# Altium PCB interface.PcbDoc
Units mil, origin at the board's own origin, x right, y up, seen from the top; angles counter-clockwise.
Board outline 2165.35 x 2086.61 mil, 2 copper layers (Top Layer, Bottom Layer); 24 components, 18 nets, 58 pads, 0 vias.
Unrouted connection lines stored in the file: 4.
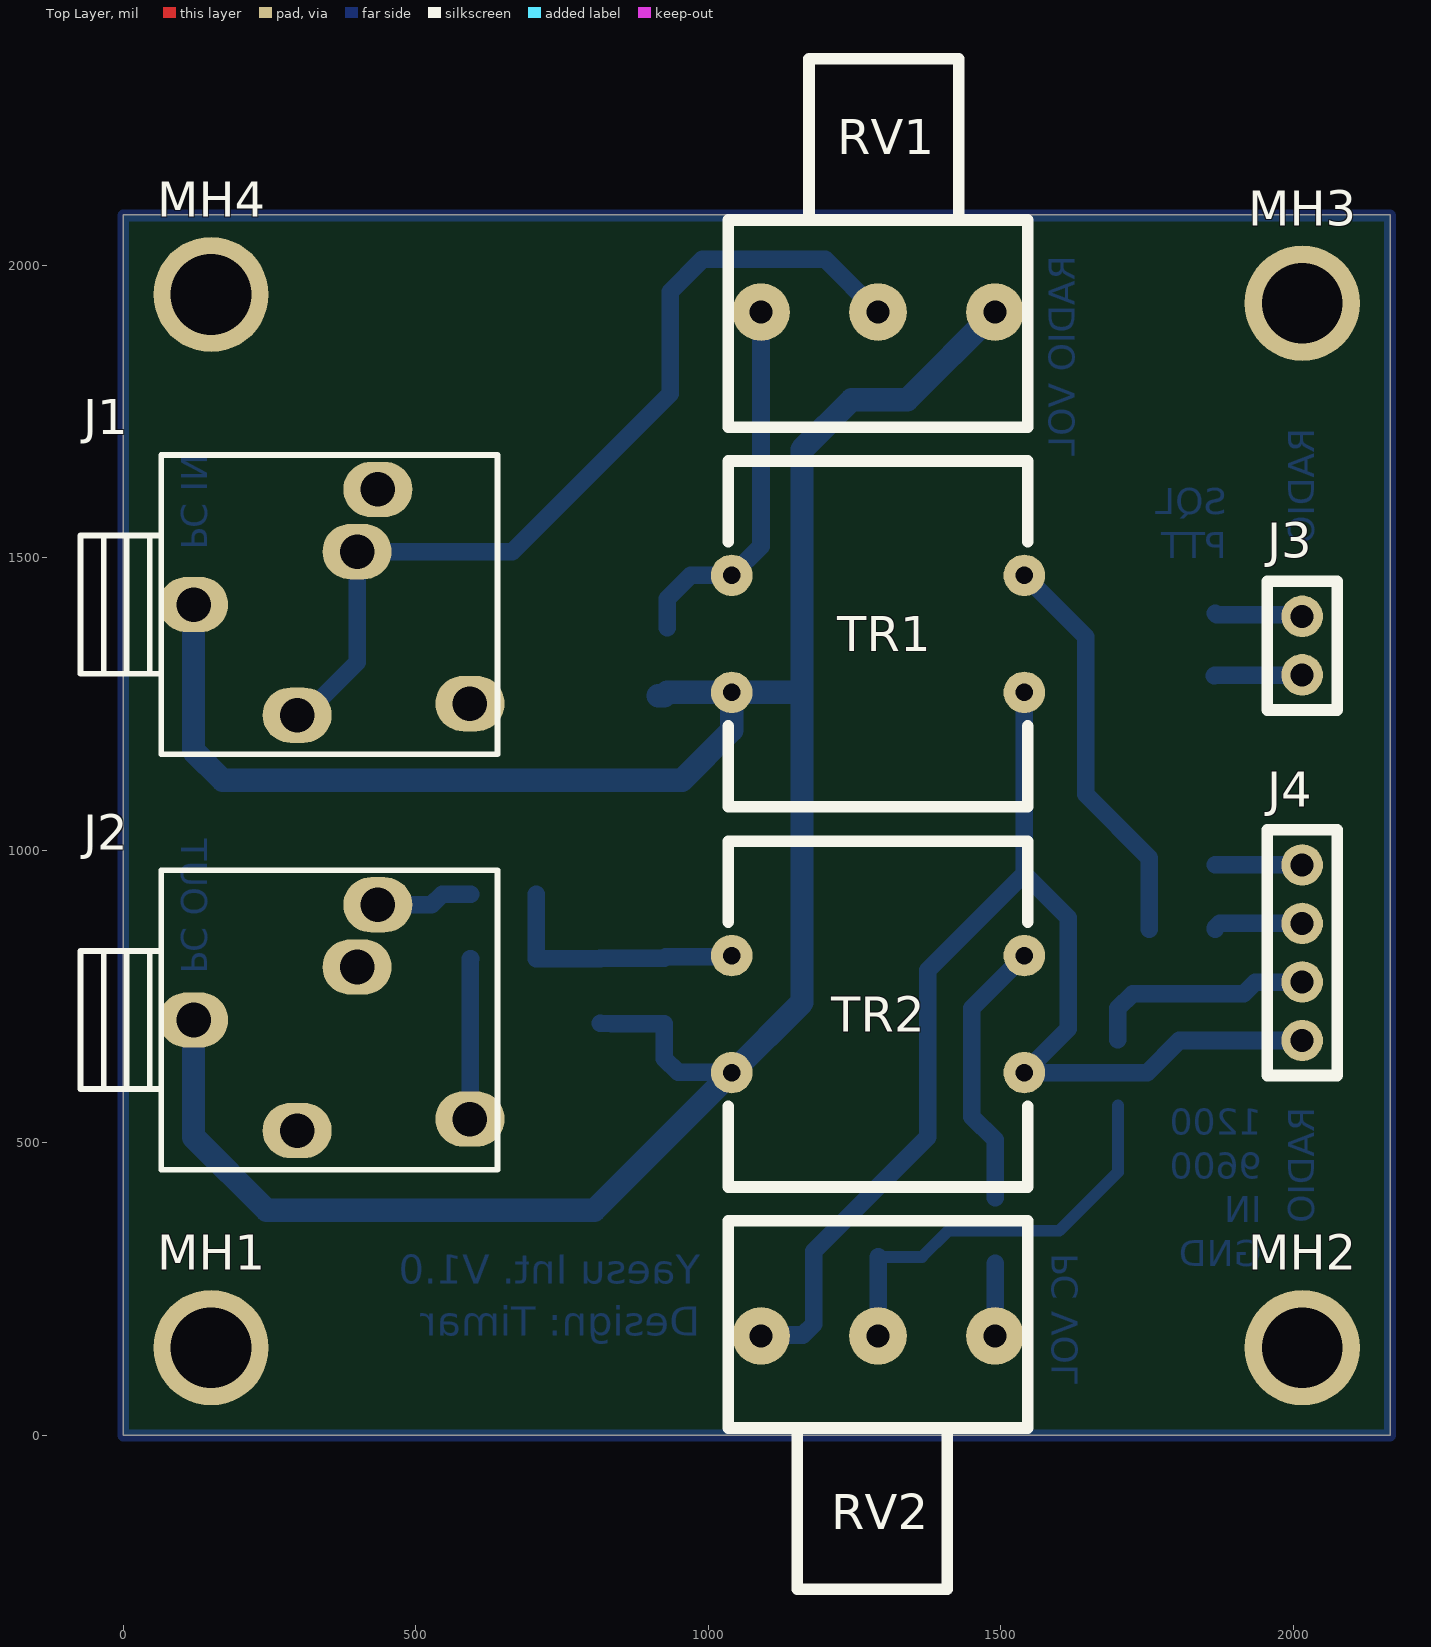
[diagram p0: Top Layer view]
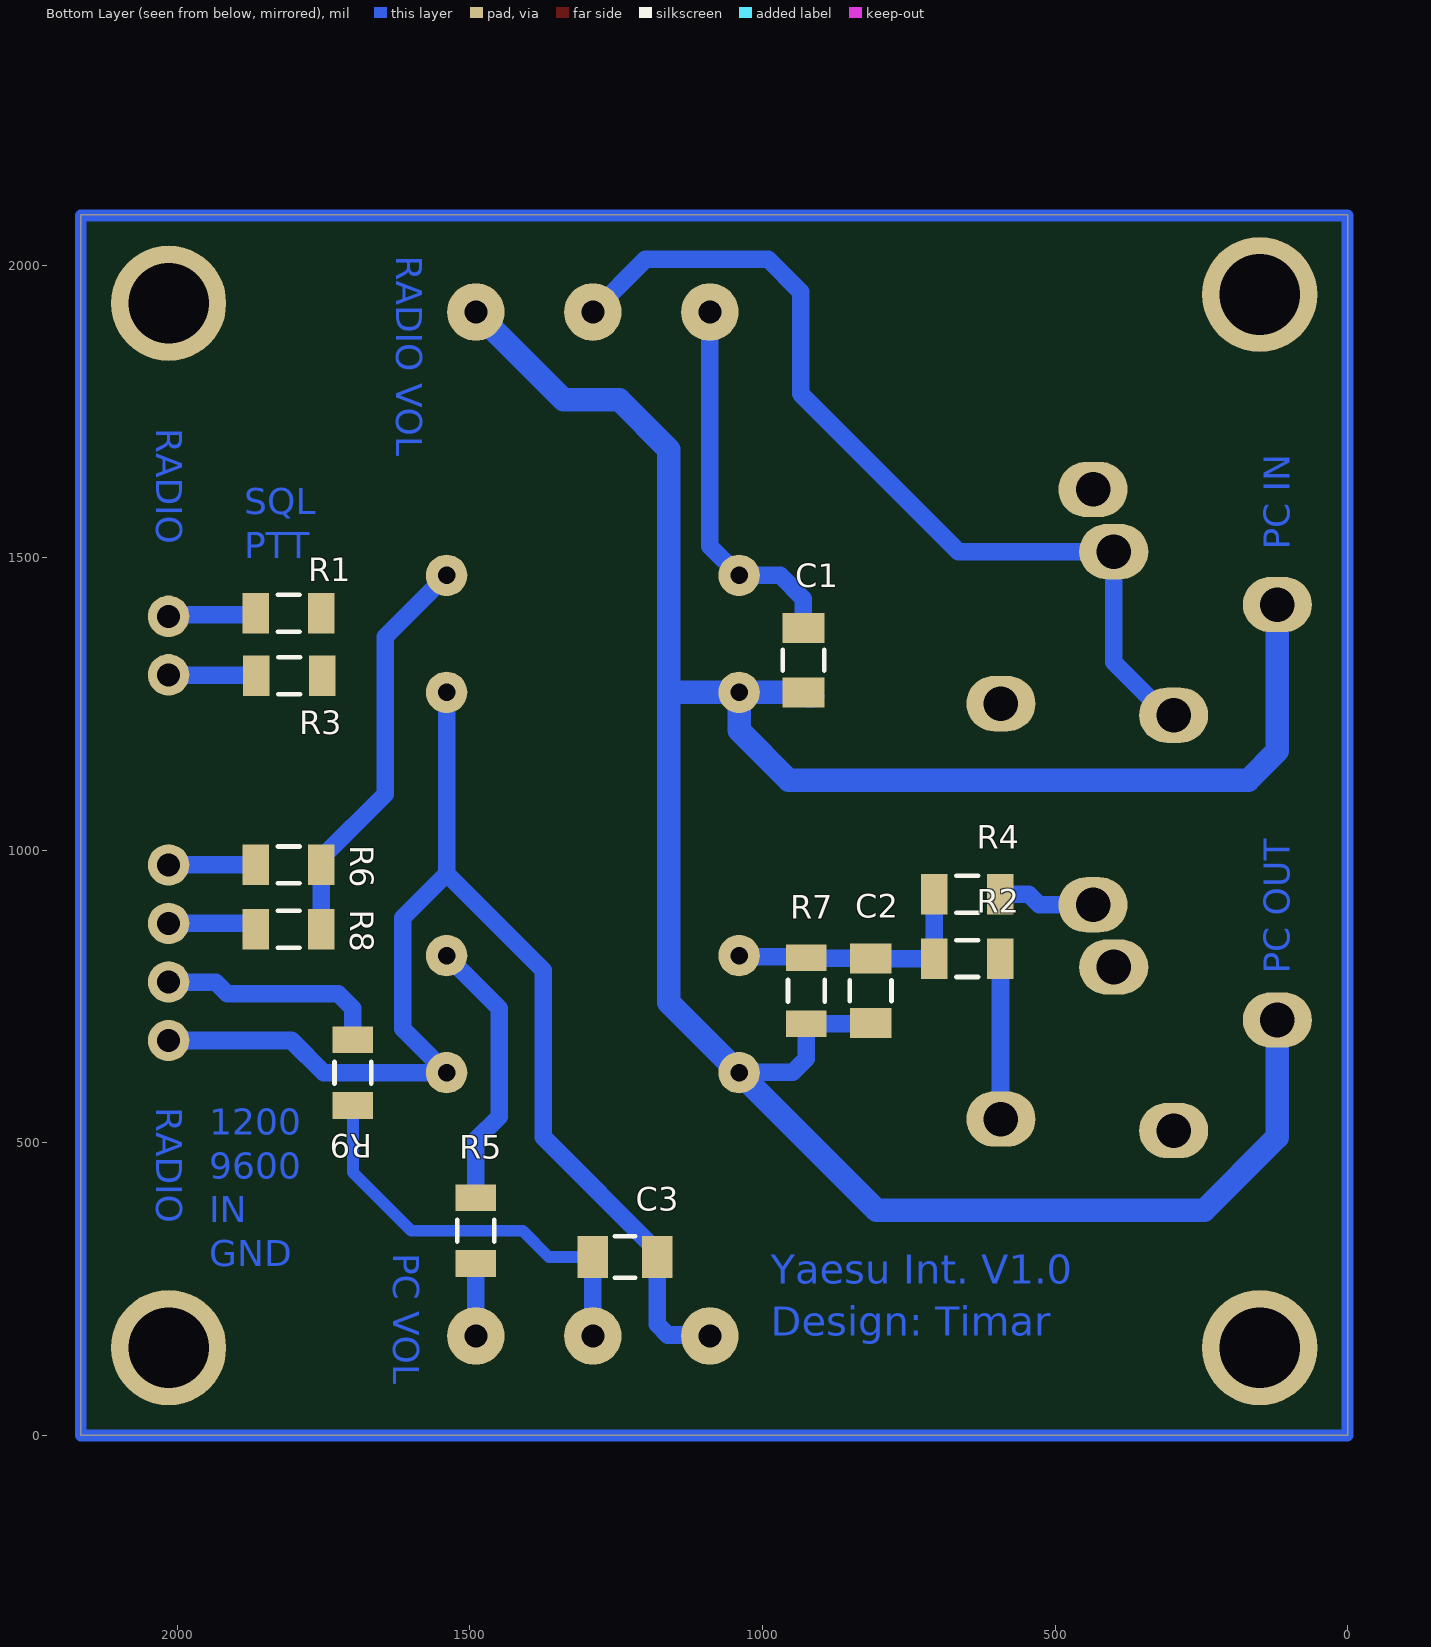
[diagram p1: Bottom Layer view, seen from below]
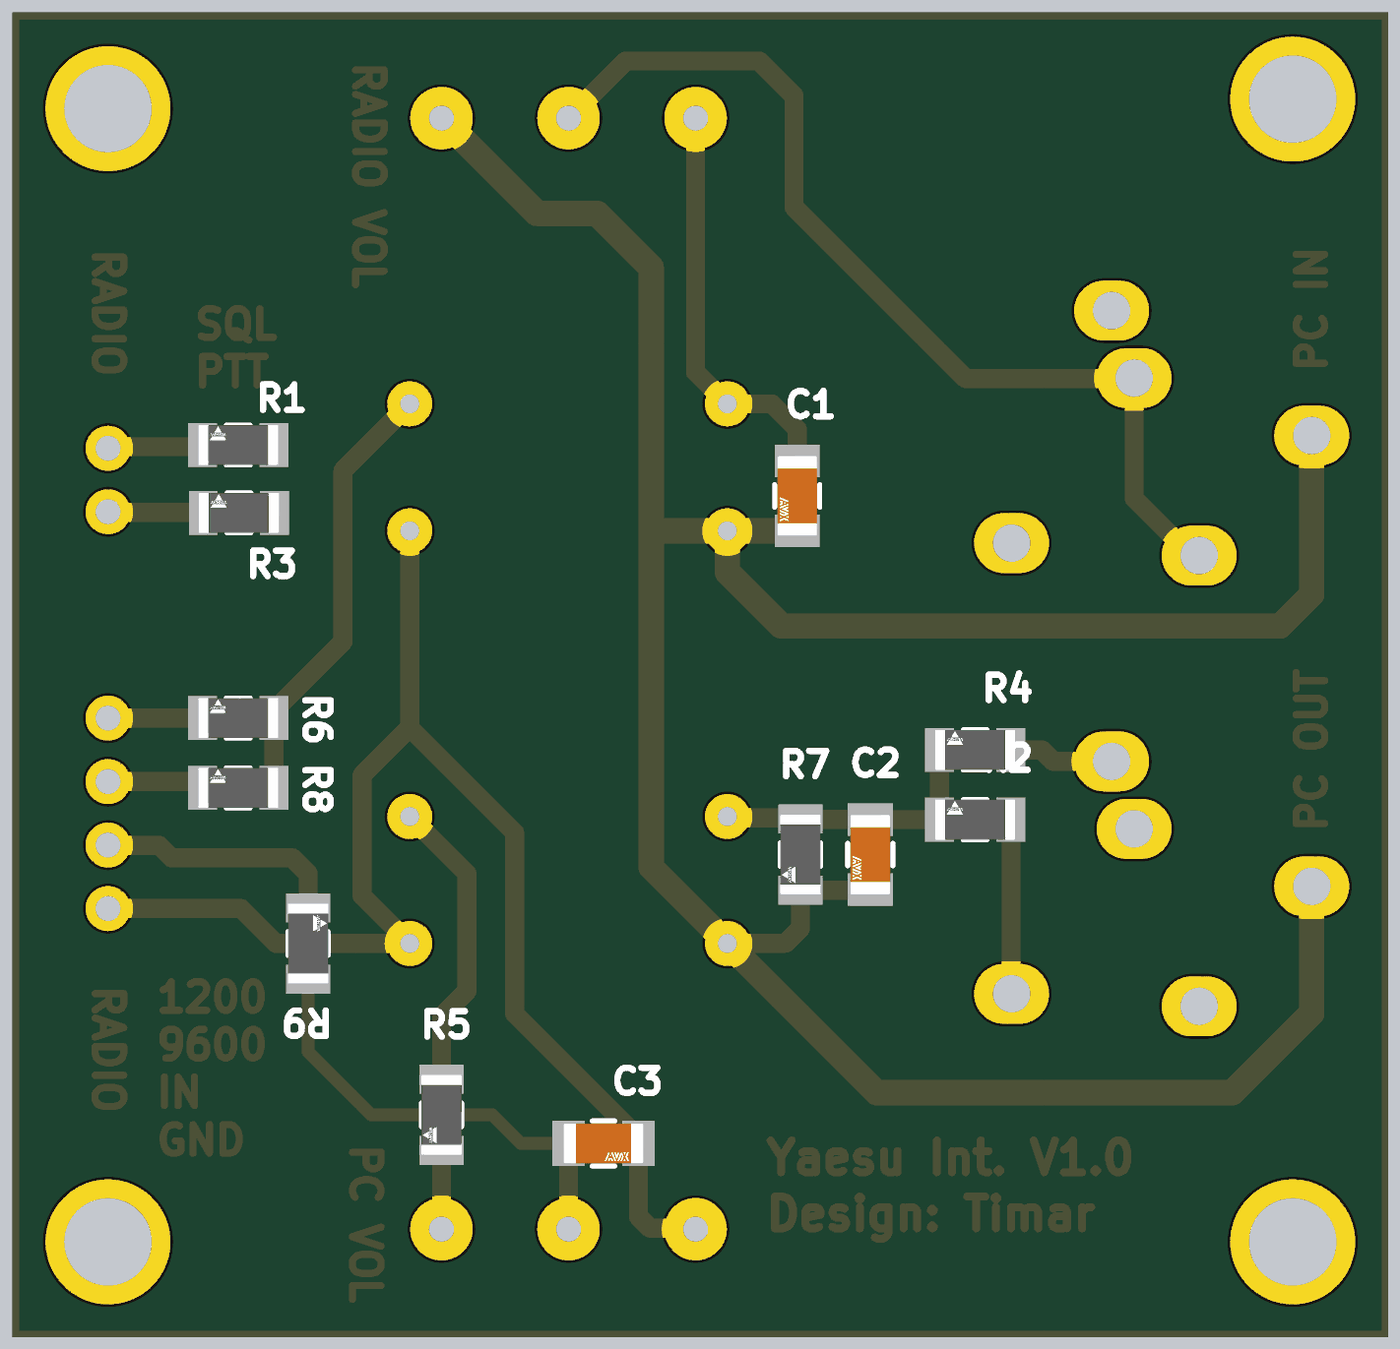
[diagram p2: 3D render of the assembled board from below, using the file's embedded part models]

## Layer stack, top to bottom
Top Solder: solder mask 0.4, Solder Resist, Dk 3.5
Top Layer: signal copper 1.4
Dielectric 1: dielectric 12.6, FR-4, Dk 4.8
Bottom Layer: signal copper 1.4
Bottom Solder: solder mask 0.4, Solder Resist, Dk 3.5

## Board outline
0,0 2165.35,0 2165.35,2086.61 0,2086.61

## Design rules (kind name [scope] priority, off if disabled: settings)
Clearance [All] p1: gap=10 ignorepadtopadclearanceinfootprint=FALSE except(0: Arc-Hole Track-Hole SMDPad-Hole THPad-Hole Via-Hole Fill-Hole Poly-Hole Region-Hole Text-Hole)
PolygonConnect [All] p1: connectstyle=Relief reliefconductorwidth=10 reliefentries=4 polygonreliefangle="90 Angle" airgapwidth=10
RoutingVias [All] p1: holewidth=28 width=50 viastyle="Through Hole" minholewidth=28 minwidth=50 maxholewidth=28 maxwidth=50
SolderMaskExpansion [All] p1: expansion=4 istentingtop=FALSE
Width [All] p1: maxlimit=60 minlimit=20 preferedwidth=20 minimp=50.000000 maximp=50.000000 favimp=50.000000
30 further rules are at their usual default settings.

## Components (designator, comment, footprint, x,y, rotation, side; value= is the part's Value field where it differs from the comment)
C1 "10n" FP-1206-L_3_2_0_2-W_1_6_0-IPC_B 930,1325 r270 bottom
C2 "10n" FP-1206-L_3_2_0_2-W_1_6_0-IPC_B 815,760 r270 bottom
C3 "10n" FP-1206-L_3_2_0_2-W_1_6_0-IPC_B 1235,305 r180 bottom
J1 "PC_IN" ACA-115 65,1420 r0 top locked
J2 "PC_OUT" ACA-115 65,710 r0 top locked
J3 "RADIO_CABLE" PIN_HEADER_1L_2P 2015,1350 r270 top locked
J4 "RADIO_CABLE" PIN_HEADER_1L_4P 2015,825 r270 top locked
MH1 "MH_3.5mm" MOUNTING_HOLE_GROUNDED 150,150 r0 top
MH2 "MH_3.5mm" MOUNTING_HOLE_GROUNDED 2015,150 r0 top
MH3 "MH_3.5mm" MOUNTING_HOLE_GROUNDED 2015,1935 r0 top
MH4 "MH_3.5mm" MOUNTING_HOLE_GROUNDED 150,1950 r0 top
R1 "Resistor" FP-CRCW1206-e3-IPC_B 1810,1405 r0 bottom
R2 "Resistor" FP-CRCW1206-e3-IPC_B 650,815 r0 bottom
R3 "Resistor" FP-CRCW1206-e3-IPC_B 1808.85,1298.21 r0 bottom
R4 "Resistor" FP-CRCW1206-e3-IPC_B 650,925 r0 bottom
R5 "Resistor" FP-CRCW1206-e3-IPC_B 1490,350 r270 bottom
R6 "Resistor" FP-CRCW1206-e3-IPC_B 1810,975 r0 bottom
R7 "Resistor" FP-CRCW1206-e3-IPC_B 925,760 r270 bottom
R8 "Resistor" FP-CRCW1206-e3-IPC_B 1810,865 r0 bottom
R9 "Resistor" FP-CRCW1206-e3-IPC_B 1700,620 r90 bottom
RV1 "1 TURN" POT_THT_200MIL 1290,1920 r180 top locked
RV2 "1 TURN" POT_THT_200MIL 1290,170 r0 top locked
TR1 "600:600" TRANSFORMER_600_600_THT_RED 1290,1370 r0 top locked
TR2 "600:600" TRANSFORMER_600_600_THT_RED 1290,720 r0 top locked

## Footprints (in the part's own frame and the unit in brackets; to place one, negate y for a bottom-side part, rotate by r counter-clockwise, add the part's x,y. Pads: shape width x height; smd on the part's side, far side on the other; paste and mask are expansions set on the pad)
ACA-115 [mm] "Jack, 3.5mm, THT, stereo, 2 switch"
  oval 3x2.4 hole 1.5: 1(1.4,0) 2(9.4,5) 3(5.9,-4.8) 4(8.5,2.3) 5(13.4,-4.3)
  silkscreen extent -3.5,-6.5 14.6,6.5
FP-1206-L_3_2_0_2-W_1_6_0-IPC_B [mil]
  rect 51.36x71.11 smd paste+0 mask+0: 1(-55.15,0) 2(55.15,0)
  silkscreen extent -18,-36 18,36, body extent -63,-31 63,31, height 37
FP-CRCW1206-e3-IPC_B [mil]
  rect 45.51x69.22 smd paste+0 mask+0: 1(-56.15,0) 2(56.14,0)
  silkscreen extent -19,-31 19,31, body extent -63,-31 63,31, height 24
MOUNTING_HOLE_GROUNDED [mm]
  round 5 hole 3.5: 1(0,0)
PIN_HEADER_1L_2P [mm]
  round 1.8 hole 1: 1(-1.27,0) 2(1.27,0)
  silkscreen extent -2.79,-1.52 2.79,1.52
PIN_HEADER_1L_4P [mm]
  round 1.8 hole 1: 1(-3.81,0) 2(-1.27,0) 3(1.27,0) 4(3.81,0)
  silkscreen extent -5.33,-1.52 5.33,1.52
POT_THT_200MIL [mm]
  round 2.5 hole 1: 1(-5.08,0) 2(0,0) 3(5.08,0)
  silkscreen extent -6.5,-11 6.5,5
TRANSFORMER_600_600_THT_RED [mm]
  round 1.8 hole 0.762: P1(-6.35,2.54) P2(-6.35,-2.54) S1(6.35,2.54) S2(6.35,-2.54)
  silkscreen extent -6.5,-7.5 6.5,7.5

## Part data
C1 C2 C3: library part cap_unpol
J1 J2: library part JACK_CONNECTOR, "Jack, 3.5mm stereo, 2 switch"
J3: library part PIN_HEADER_1L_2P
J4: library part PIN_HEADER_1L_4P
MH1 MH2 MH3 MH4: library part MOUNTING_HOLE_3.5mm_1, "3.5mm grounded mounting hole"
R1 R3 R6 R8 R9: "EU symbol", Resistance=DNM
R2 R4: "EU symbol", Resistance=360R
R5 R7: "EU symbol", Resistance=1k
RV1 RV2: library part POT, Resistance=10k, Type=LIN
TR1 TR2: library part Transformer, "1 Primer; 1 Seconder"

## Nets (pads, with @x,y where several pads share a name; then routed paths per layer and width w, separated by ;. In a path a pad name is that pad's centre, name@x,y a point inside that pad or via, vN(x,y) a via of type N, cw(c..) or ccw(c..) an arc to the next point about the centre after c; other vN are vias at no path point)
GND_PC: C1.2 C2.2 J1.1 J2.1 MH1.1 MH4.1 R7.2 RV1.1 TR1.P2 TR2.P2 | length 4653.5
  Bottom Layer w30: C2.2@815.33,704.19 C2.2@843.71,703.71 ; C2.2@835,703.86 R7.2 925,643.86 948.43,620.43 TR2.P2@1039.57,620.43
  Bottom Layer w40: J2.1 120.12,509.88 245,385 805,385 TR2.P2 ; J1.1 120.12,1169.88 170,1120 955,1120 1040,1205 TR1.P2 ; C1.2@914.17,1264.17 924.32,1264.17 930.07,1269.93 1039.93,1269.93 TR1.P2 ; TR2.P2@1039.57,620.43 TR2.P2 ; RV1.1 1340,1770 1245,1770 1160,1685 1160,1270 ; TR2.P2 1160,740 1160,1270 ; TR1.P2 1160,1270
GND_RTX: C3.2 J4.4 MH2.1 MH3.1 RV2.1 TR1.S2 TR2.S2 | length 2227.3
  Bottom Layer w30: RV2.1 1091.62,171.62 1161.62,171.62 1179.85,189.85 C3.2 1179.85,314.87 1375,510.02 1375,795 1540,960 ; TR1.S2 1540,960 ; J4.4 1805,675 1750,620 TR2.S2 1615,695 1615,885 1540,960
NetC1_1: C1.1 RV1.3 TR1.P1 | length 647.1
  Bottom Layer w30: C1.1 930,1430 970,1470 TR1.P1 1090,1520 RV1.3
NetC2_1: C2.1 R2.2 R4.2 R7.1 TR2.P1 | length 445.9
  Bottom Layer w30: R4.2 R2.2 706.22,815.07 814.93,815.07 C2.1 815.5,815.65 924.5,815.65 R7.1 926.93,818.07 1038.07,818.07 TR2.P1
NetJ1_3: J1.3 J1.4 RV1.2 | length 1566.3
  Bottom Layer w30: J1.3 309.09,1231.02 399.65,1321.57 J1.4 400.2,1510 665,1510 935,1780 935,1955 990,2010 1200,2010 RV1.2
NetJ2_2: J2.2 R4.1 | length 166.3
  Bottom Layer w30: J2.2 526.85,906.85 545,925 R4.1
NetJ2_5: J2.5 R2.1 | length 274.8
  Bottom Layer w30: J2.5 593.21,541.36 593.21,814.35 R2.1
NetJ3_1: J3.1 R1.2 | length 150.9
  Bottom Layer w30: R1.2 1868.65,1402.5 2012.5,1402.5 J3.1
NetJ3_2: J3.2 R3.2 | length 150.7
  Bottom Layer w30: R3.2 1865.9,1299.1 2014.1,1299.1 J3.2
NetJ4_1: J4.1 R6.2 | length 148.9
  Bottom Layer w30: R6.2 J4.1
NetJ4_2: J4.2 R8.2 | length 154.3
  Bottom Layer w30: R8.2 1866.15,867.24 1873.9,875 J4.2
NetJ4_3: J4.3 R9.2 | length 387.5
  Bottom Layer w30: R9.2 1700,730 1725,755 1915,755 1934.57,774.57 2014.57,774.57 J4.3
NetR5_1: R5.1 TR2.S1 | length 467.7
  Bottom Layer w30: R5.1 1490,505 1450,545 1450,730 TR2.S1
NetR5_2: R5.2 RV2.3 | length 123.9
  Bottom Layer w30: RV2.3 R5.2
PTT: R1.1
RADIO_AUDIO_IN: C3.1 R9.1 RV2.2 | length 718.8
  Bottom Layer w20: RV2.2 RV2.2@1290.07,170.07 ; C3.1@1290.07,304.93 C3.1 1365,305 1410,350 1600,350 1700,450 R9.1
  Bottom Layer w30: RV2.2@1290.07,170.07 C3.1@1290.07,304.93
RADIO_AUDIO_OUT: R6.1 R8.1 TR1.S1 | length 693.6
  Bottom Layer w30: TR1.S1 1645,1365 1645,1095.71 1753.85,986.85 R6.1 R8.1
SQL: R3.1
pads on no net: J1.2 J1.5 J2.3 J2.4
copper on no net: | length 8500
  Bottom Layer w20: 0,0 0,2085 2165,2085 2165,0 0,0

## Other copper
Bottom Layer:
  text "RADIO VOL" at 1626,2016 h45 r90
  text "RADIO" at 2036,1721 h45 r90
  text "SQL" at 1886,1574 h45
  text "PC IN" at 99,1514 h45 r270
  text "PTT" at 1886,1499 h45
  text "PC OUT" at 99,789 h45 r270
  text "RADIO" at 2036,561 h45 r90
  text "1200" at 1946,514 h45
  text "9600" at 1946,439 h45
  text "IN" at 1946,364 h45
  text "PC VOL" at 1631,311 h45 r90
  text "GND" at 1946,289 h45
  text "Yaesu Int. V1.0" at 986,259 h50
  text "Design: Timar" at 986,170.66 h50